# EAGLE board ASD2101 (EAGLE 6.2)
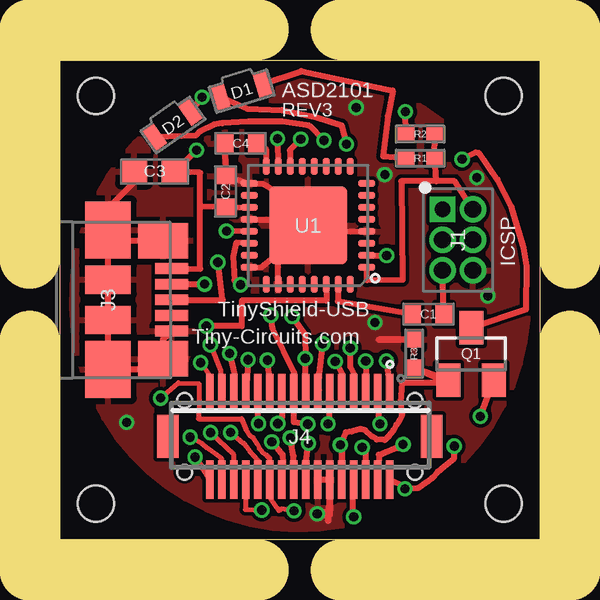
[diagram p0: board, top side]
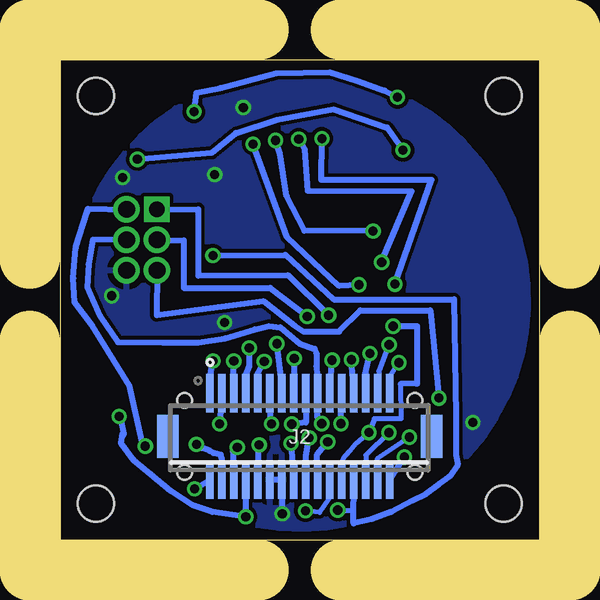
[diagram p1: board, bottom side, seen from below]

Size 20 x 20 mm. Coordinates in mm from the lower left corner, seen from the top.
Outline: 0,20 20,20 20,0 0,0 0,20
Copper layers (1*16): Top 0.035mm / dielectric 1.5mm / Bottom 0.035mm
Design rules: minimum track width 8mil, minimum drill 15mil, track to track 6mil, track to pad 6mil, pad to pad 6mil, via to via 6mil, smd to smd 6mil, copper to edge 6mil, drill to drill 8mil, minimum pad ring 8mil, minimum via ring 5mil, stop-mask expansion 4mil, vias tented up to drill 25mil, thermal gap 10mil
Net classes: 2 gnd: width 0.305 mm, drill 0.559 mm, clearance 0.254 mm
Holes 1.5 mm at 1.5,18.5 18.5,18.5 18.5,1.5 1.5,1.5
Milling: 8 lines

## Footprints (pad centres in the part's own frame; a part is rotated, then mirrored left to right if it is on the bottom)
C0402 = smd 0.7 x 0.9: 1 -0.65,0; 2 0.65,0
C0603 = smd 1.1 x 1: 1 -0.85,0; 2 0.85,0
LNJ_LED = smd 1 x 0.55: A 0,0.9; C 0,-0.9
2X3_.05"_TH_HEADER = drill 0.65 pad 1.016 square: 1 -0.635,1.27 | drill 0.7 pad 1.016: 2 0.635,1.27; 3 -0.635,0; 4 0.635,0; 5 -0.635,-1.27; 6 0.635,-1.27
DF12-32-DS = smd 0.3 x 1.6: 1 -3.75,1.8; 2 -3.75,-1.8; 3 -3.25,1.8; 4 -3.25,-1.8; 5 -2.75,1.8; 6 -2.75,-1.8; 7 -2.25,1.8; 8 -2.25,-1.8; 9 -1.75,1.8; 10 -1.75,-1.8; 11 -1.25,1.8; 12 -1.25,-1.8; 13 -0.75,1.8; 14 -0.75,-1.8; 15 -0.25,1.8; 16 -0.25,-1.8; 17 0.25,1.8; 18 0.25,-1.8; 19 0.75,1.8; 20 0.75,-1.8; 21 1.25,1.8; 22 1.25,-1.8; 23 1.75,1.8; 24 1.75,-1.8; 25 2.25,1.8; 26 2.25,-1.8; 27 2.75,1.8; 28 2.75,-1.8; 29 3.25,1.8; 30 3.25,-1.8; 31 3.75,1.8; 32 3.75,-1.8 | smd 0.9 x 1.8: F1 -5.5,0; F2 5.5,0 | hole 0.6: -4.8,1.5; 4.8,1.5
MICRO_USB = smd 1.38 x 0.45: 1 2.66,1.3; 2 2.66,0.65; 3 2.66,0; 4 2.66,-0.65; 5 2.66,-1.3 | smd 2.1 x 1.475: P1 2.3,-2.462; P2 2.3,2.462 | smd 1.9 x 2.375: P3 0,2.913; P4 0,-2.913 | smd 1.9 x 1.175: P5 0,0.838; P6 0,-0.838
DF12-32-DP = smd 0.3 x 1.6: 1 -3.75,-1.8; 2 -3.75,1.8; 3 -3.25,-1.8; 4 -3.25,1.8; 5 -2.75,-1.8; 6 -2.75,1.8; 7 -2.25,-1.8; 8 -2.25,1.8; 9 -1.75,-1.8; 10 -1.75,1.8; 11 -1.25,-1.8; 12 -1.25,1.8; 13 -0.75,-1.8; 14 -0.75,1.8; 15 -0.25,-1.8; 16 -0.25,1.8; 17 0.25,-1.8; 18 0.25,1.8; 19 0.75,-1.8; 20 0.75,1.8; 21 1.25,-1.8; 22 1.25,1.8; 23 1.75,-1.8; 24 1.75,1.8; 25 2.25,-1.8; 26 2.25,1.8; 27 2.75,-1.8; 28 2.75,1.8; 29 3.25,-1.8; 30 3.25,1.8; 31 3.75,-1.8; 32 3.75,1.8 | smd 0.9 x 1.8: F1 -5.5,0; F2 5.5,0 | hole 0.6: -4.8,1.5; 4.8,1.5
SOT23 = smd 1 x 1.4: 1 -0.95,-1.1; 2 0.95,-1.1; 3 0,1.1
0402 = smd 0.7 x 0.6: 1 -0.6,0; 2 0.6,0
MLF32 = smd 0.7 x 0.28: 1 -2.45,1.75; 2 -2.45,1.25; 3 -2.45,0.75; 4 -2.45,0.25; 5 -2.45,-0.25; 6 -2.45,-0.75; 7 -2.45,-1.25; 8 -2.45,-1.75; 17 2.45,-1.75; 18 2.45,-1.25; 19 2.45,-0.75; 20 2.45,-0.25; 21 2.45,0.25; 22 2.45,0.75; 23 2.45,1.25; 24 2.45,1.75 | smd 0.28 x 0.7: 9 -1.75,-2.45; 10 -1.25,-2.45; 11 -0.75,-2.45; 12 -0.25,-2.45; 13 0.25,-2.45; 14 0.75,-2.45; 15 1.25,-2.45; 16 1.75,-2.45; 25 1.75,2.45; 26 1.25,2.45; 27 0.75,2.45; 28 0.25,2.45; 29 -0.25,2.45; 30 -0.75,2.45; 31 -1.25,2.45; 32 -1.75,2.45 | smd 3.254 x 3.254: 33 0,0

## Placement (x,y rotation side)
C1  0.1uF  [C0402]  15.36,9.4 0 top
C2  0.1uF  [C0402]  6.91,14.51 90 top
C3  10uF  [C0603]  3.94,15.35 180 top
C4  0.1uF  [C0402]  7.53,16.52 180 top
D1  AMBER  [LNJ_LED]  7.57,18.72 287 top
D2  AMBER  [LNJ_LED]  4.7,17.3 305 top
J1  20021111  [2X3_.05"_TH_HEADER]  16.59,12.5 0 top
J2  DF12-32-DS  [DF12-32-DS]  10,4.3 0 bottom
J3  47346-0001  [MICRO_USB]  2,10 0 top
J4  DF12-32-DP  [DF12-32-DP]  10,4.3 180 top
Q1  DMP2035U  [SOT23]  17.15,7.74 0 top
R1  1.00K  [0402]  15.02,15.9 0 top
R2  1.00K  [0402]  15.03,16.91 0 top
R3  1.00K  [0402]  14.77,7.75 270 top
U1  FT232RQ  [MLF32]  10.35,13.1 180 top
U$1  [DOCFIELD-TINYCIRCUITS-PCB]  33.97,-10.03 0 top  (outside the outline)

## Library data of the parts
C1 C2 C4 = tinycircuits; PARTNO: AS-ITM-00008
C3 = tinycircuits; PARTNO: AS-ITM-00002
D1 D2 = tinycircuits; PARTNO: AS-ITM-00026
J1 = tinycircuits; DNP: T; PARTNO: AS-ITM-00022
J2 = tinycircuits; PARTNO: AS-ITM-00012
J3 = tinycircuits; PARTNO: AS-ITM-00021
J4 = tinycircuits; PARTNO: AS-ITM-00015
Q1 = tinycircuits; PARTNO: AS-ITM-00024
R1-R3 = tinycircuits; PARTNO: AS-ITM-00003
U1 = tinycircuits; PARTNO: AS-ITM-00029
U$1 = tinycircuits; NO_BOM: TRUE

## Nets
+3V3: J2.6 J4.6
+5V: J2.8 J4.8 Q1.2
AD0: J2.11 J4.11
AD1: J2.9 J4.9
AD2: J2.7 J4.7
AD3: J2.5 J4.5
AD4/SDA: J2.3 J4.3
AD5/SCL: J2.1 J4.1
AREF: J2.13 J4.13
DTR: C1.1 U1.31
GND: C2.2 C3.2 C4.2 J1.6 J2.12 J2.14 J3.5 J3.P1 J3.P2 J3.P3 J3.P4 J3.P5 J3.P6 J4.12 J4.14 R3.1 U1.4 U1.17 U1.20 U1.24 U1.26 U1.33
IO0: J2.24 J4.24 U1.30
IO1: J2.26 J4.26 U1.2
IO2: J2.28 J4.28
IO3: J2.30 J4.30
IO4: J2.32 J4.32
IO5: J2.31 J4.31
IO6: J2.29 J4.29
IO7: J2.27 J4.27
IO8: J2.25 J4.25
IO9: J2.23 J4.23
MISO: J1.1 J2.17 J4.17
MOSI: J1.4 J2.19 J4.19
N$1: C4.1 U1.16
N$2: J3.2 U1.15
N$5: D2.C U1.21
N$6: D1.A R1.1
N$7: D2.A R2.1
N$13: J3.3 U1.14
N$16: D1.C U1.22
RESET: C1.2 J1.5 J2.22 J4.22
RSV0: J2.20 J4.20
RSV1: J2.18 J4.18
RSV2: J2.16 J4.16
SCK: J1.3 J2.15 J4.15
SS: J2.21 J4.21
USBVCC: C2.1 C3.1 J3.1 Q1.3 U1.19
VBATT: J2.4 J4.4
VCC: J1.2 J2.2 J4.2 R1.2 R2.2 U1.1
VIN: J2.10 J4.10 Q1.1 R3.2

## Tracks (layer width: path | path; a pad name or v marks a point on that pad's centre or on a via)
+3V3  (via drill 0.38)
  Top 0.254: J2.6 12.76,3.69 v12.61,3.84
  Bottom 0.254: v12.61,3.84 12.78,3.66 12.78,2.53 J2.6
+5V  (via drill 0.38)
  Top 0.203: J2.8 12.22,1.92 12.24,2.36 J2.8
  Top 0.254: J2.8 | v17.53,5.14 Q1.2 | v12.25,0.95 12.23,1 12.23,1.1 12.22,1.1 12.22,1.92
  Bottom 0.254: 12.25,1.99 J2.8 | J2.8 | v17.53,5.14 17.43,4.91 17.33,4.4 17.41,4.28 17.38,4.43 17.46,4.02 16.92,3.31 16.21,2.72 15.38,2.01 14.46,1.43 13.65,1.15 v12.25,0.95 J2.8 | J2.8
AD0  (via drill 0.38)
  Top 0.254: v11.18,4.82 11.24,5.05 J2.11
  Bottom 0.254: J2.11 11.28,5.79 v11.18,4.82
AD1  (via drill 0.38)
  Top 0.254: v11.48,7.43 11.75,6.93 11.74,6.13 J2.9
  Bottom 0.254: J2.9 11.75,6.94 v11.48,7.43
AD2  (via drill 0.38)
  Top 0.254: J2.7 12.25,6.92 12.11,7.22 v12.11,7.99
  Bottom 0.254: v12.11,7.99 12.11,7.24 12.26,6.86 12.23,6.09 J2.7
AD3  (via drill 0.38)
  Top 0.254: J2.5 12.75,6.28 v12.75,7.44
  Bottom 0.254: v12.75,7.44 12.75,6.3 J2.5
AD4/SDA  (via drill 0.38)
  Top 0.254: v13.34,4.82 13.31,5 J2.3
  Bottom 0.254: J2.3 13.22,5.85 v13.34,4.82
AD5/SCL  (via drill 0.38)
  Top 0.254: J2.1 13.77,6.27 v13.61,7.45
  Bottom 0.254: v13.61,7.45 13.78,6.55 J2.1
AREF  (via drill 0.38)
  Top 0.254: 10.8,6.27 J2.13 10.8,6.91 v10.95,8.17
  Bottom 0.254: v10.95,8.17 10.77,6.59 J2.13
DTR
  Top 0.254: U1.31 11.59,9.94 C1.1
GND  (via drill 0.38)
  Top 0.254: J4.12 | J3.5 4.3,8.34 J3.P1 3.85,7.09 J3.P4 J3.P6 J3.P5 J3.P3 | J3.P3 2.45,12.46 J3.P2 | C3.2 3.09,14.9 1.96,13.77 1.96,12.95 J3.P3 | C4.2 C2.2 U1.17 8.47,14.84 9.79,14.05 9.61,13.29 | U1.20 9.38,13.34 9.61,13.29 | 9.61,13.29 U1.33 | U1.24 8.41,11.36 8.82,11.69 | 8.82,11.69 9.56,12.3 U1.33 | U1.4 11.08,12.81 U1.33 | J4.12 J4.14 | J4.12 11.26,1.2 v10.73,1.07 | J1.6 17.3,11.16 | 17.3,11.16 17.23,11.16 | R3.1 14.77,8.34 | 17.3,11.16 17.41,11.16 17.15,11.21 | R3.1 14.87,8.39 | J4.12 11.23,1 10.75,0.97 | R3.1 13.29,8.34 14.77,8.31 | J4.12 11.18,0.77 11.18,0.79 | U1.26 9.1,11.69 8.82,11.69
  Bottom 0.254: J4.12 J4.14 v10.73,1.07
  other vias: 2.78,4.88 12.35,18.02 13.55,15.22 17.38,15.1 13.14,9.05 17.84,10.17
  pour Top: 18.49,5.61 arc180 1.54,14.32 arc180
  pour Bottom: 18.49,5.61 arc180 1.54,14.32 arc180
IO0  (via drill 0.38)
  Top 0.203: J2.24 8.23,2.49 8.23,2.46 J2.24 | v7.11,4.46 7.66,4.02 7.77,3.87 7.92,3.68 8.05,3.51 8.27,3.27 8.28,3.21 8.26,2.79 J2.24
  Top 0.254: U1.30 11.11,9.96 7.58,9.96 7.58,8.9 v6.1,8.9
  Bottom 0.203: J2.24 8.22,3.01 8.21,3.29 8.17,3.39 8.07,3.5 7.91,3.69 7.65,4.02 v7.11,4.46 6.89,5.04 5.77,5.04 5.8,6.48
  Bottom 0.254: J2.24 | v6.1,8.9 5.11,8.9 5.11,6.51 5.14,6.51 5.8,6.48
IO1  (via drill 0.38)
  Top 0.203: 7.74,2.41 J2.26 7.73,1.25 v8.41,1.23
  Top 0.254: U1.2 v13.62,11.84
  Bottom 0.203: 7.76,2.33 J2.26 7.75,1.38 7.83,1.23 v8.41,1.23
  Bottom 0.254: v13.62,11.84 10.6,11.87 8.59,10.02 3.56,10.02 3.49,5.14 3.49,3.54 3.41,3.11 3.77,2.62 4.2,2.29 4.76,1.89 5.29,1.63 6.18,1.15 7.02,0.85 7.75,0.67 J2.26
IO2  (via drill 0.38)
  Top 0.203: 7.24,1.91 7.24,1.9 J2.28 | 7.25,1.99 J2.28 | J2.28 7.26,3.53 v6.28,4.46
  Bottom 0.203: v6.28,4.46 7.25,3.52 7.24,2.34 J2.28
IO3  (via drill 0.38)
  Top 0.203: J2.30 6.74,3.35 6.73,3.41 6.19,3.79 6.13,3.82 5.92,4 v5.43,4.27
  Top 0.254: J2.30
  Bottom 0.203: J2.30 6.75,3.38 v5.43,4.27
IO4  (via drill 0.38)
  Top 0.254: v5.64,3.44 J2.32
  Bottom 0.254: J2.32 v5.64,3.44
IO5  (via drill 0.38)
  Top 0.203: v5.87,7.38 6.26,6.82
  Top 0.254: 6.26,6.82 6.26,6.12 J2.31
  Bottom 0.203: 6.26,6.78 v5.87,7.38
  Bottom 0.254: J2.31 6.26,6.78
IO6  (via drill 0.38)
  Top 0.203: J2.29 6.71,7.02 v6.27,8.12
  Bottom 0.203: v6.27,8.12 6.7,7.03 6.76,6.36 J2.29
  Bottom 0.254: 6.78,5.56 J2.29
IO7  (via drill 0.38)
  Top 0.254: v7.08,7.76 7.28,6.86 J2.27
  Bottom 0.254: J2.27 7.25,5.76 7.25,6.92 v7.08,7.76
IO8  (via drill 0.38)
  Top 0.254: v7.84,7.5 7.84,7.48 J2.25
  Bottom 0.254: J2.25 7.76,6.12 | J2.25 7.76,6.14 7.76,6.08 | J2.25 v7.84,7.5
IO9  (via drill 0.38)
  Top 0.254: v8.28,4.83 8.25,4.97 J2.23
  Bottom 0.254: J2.23 8.28,5.59 v8.28,4.83
MISO  (via drill 0.38)
  Top 0.254: v10.33,4.81 9.75,4.89 9.75,6.07 J2.17 9.76,6.97 8.87,8.8 v8.8,9.36
  Bottom 0.254: J2.17 9.75,4.88 v10.33,4.81 | J1.1 14.23,13.77 14.23,11.01 10.5,11.03 v8.8,9.36
MOSI  (via drill 0.38)
  Top 0.254: J2.19 9.25,5.07 v9.08,4.83
  Bottom 0.254: v9.08,4.83 9.25,5.08 9.25,6.07 J2.19 9.3,7.22 9.3,7.78 9.38,7.96 10.02,8.19 10.8,8.85 11.29,8.9 11.87,8.77 13.11,8.39 14.23,8.21 15.7,8.21 17.58,8.24 18.32,9.3 18.85,10.52 18.8,11.49 18.63,12.5 J1.4
N$1
  Top 0.254: C4.1 8.59,16.29 U1.16
N$2  (via drill 0.38)
  Top 0.254: J3.2 v6.03,10.65 | v9.07,16.72 U1.15
  Bottom 0.254: v6.03,10.65 4.5,14.99 9.1,14.99 v9.07,16.72
N$5  (via drill 0.38)
  Top 0.254: U1.21 v6.94,12.86 | v11.01,16.64 10.4,17.25 9.28,17.43 7.86,17.43 6.76,17.36 6.41,17.3 5.85,17.03 5.67,16.85 D2.C
  Bottom 0.254: v6.94,12.86 9.81,12.89 10.55,14.33 10.83,16.09 v11.01,16.64
N$6
  Top 0.254: D1.A 10.07,19.54 13.88,18.73 13.67,17.66 13.47,15.98 R1.1
N$7  (via drill 0.38)
  Top 0.254: R2.1 v14.41,17.84 | v5.93,18.45 D2.A
  Bottom 0.254: v14.41,17.84 14.38,17.96 14.31,18.63 13.32,18.83 10.98,19.44 8.75,19.49 7.55,19.11 6.46,18.73 v5.93,18.45
N$13  (via drill 0.38)
  Top 0.254: v10.04,16.7 9.58,16.24 U1.14 | J3.3 6.79,9.99 v6.59,11.57
  Bottom 0.254: v6.59,11.57 5.34,14.51 9.66,14.54 9.79,16.26 v10.04,16.7
N$16  (via drill 0.38)
  Top 0.254: U1.22 7.35,12.38 7.22,11.79 7.27,10.8 v7.53,10.62 | D1.C 7.8,17.96 9.25,17.91 10.7,17.61 11.74,17.28 v11.95,16.49
  Bottom 0.254: v7.53,10.62 8.36,10.57 10.52,12.61 v11.95,16.49
RESET  (via drill 0.38)
  Top 0.203: v4.2,5.9 4.94,6.54 5.8,6.51 5.8,5.65 5.77,5.04 7.58,5.04 7.75,4.58 7.91,4.35 8.06,4.25 8.21,3.99 8.31,3.79 8.44,3.64 8.62,3.51 8.75,3.39 J2.22 8.8,1.68 9.13,1.2 9.23,1.28 v9.76,1.2
  Top 0.254: J2.22 | C1.2 J1.5
  Bottom 0.203: J2.22 8.8,1.68 9.18,1.12 v9.76,1.2
  Bottom 0.254: J1.5 15.96,9.36 11.51,9.94 10.22,8.92 9.84,8.67 8.36,8.67 7.48,9.56 4.55,9.56 v4.2,5.9
RSV0  (via drill 0.38)
  Top 0.254: v8.83,4.08 9.29,3.54 9.3,3.21 J2.20
  Bottom 0.254: J2.20 9.27,3.54 v8.83,4.08
RSV1  (via drill 0.38)
  Top 0.254: J2.18 9.74,2.51 9.74,3.48 9.66,3.92 v9.61,4.24
  Bottom 0.254: J2.18 9.75,3.48 v9.61,4.24
RSV2  (via drill 0.38)
  Top 0.254: J2.16 10.24,3.12 v10.37,4.01
  Bottom 0.254: v10.37,4.01 J2.16
SCK  (via drill 0.38)
  Top 0.254: v9.68,9.3 10.22,8.54 v10.23,7.55 10.24,7.58 J2.15
  Bottom 0.254: J1.3 14.84,12.48 14.84,10.5 11.23,10.5 v9.68,9.3 | v10.23,7.55 J2.15
SS  (via drill 0.38)
  Top 0.254: J2.21 8.75,6.25 v8.65,7.48
  Bottom 0.254: v8.65,7.48 8.74,6.05 J2.21
USBVCC  (via drill 0.38)
  Top 0.254: U1.19 6.89,13.88 C2.1 5.84,13.88 | J3.1 5.85,11.29 5.84,13.88 | 5.84,13.88 5.85,15.3 C3.1 v5.7,16.24 | Q1.3 19.44,9.61 19.46,11.41 19.34,12.15 18.83,13.88 18.25,15.02 17.48,16.11 17.33,16.14 v16.77,15.86
  Bottom 0.254: v16.77,15.86 13.65,16.14 12.66,16.95 10.95,17.51 8.59,17.94 6.36,17.18 v5.7,16.24
VBATT  (via drill 0.38)
  Top 0.254: v14.31,3.97 14.16,3.82 14.05,3.82 13.44,3.56 13.29,3.54 J4.4
  Bottom 0.254: J4.4 13.25,3.37 13.29,3.54 13.6,3.61 13.75,3.69 14.08,3.82 v14.31,3.97
VCC  (via drill 0.38)
  Top 0.254: v16.44,3.89 16.44,3.39 16.04,3.06 15.76,2.83 15.53,2.57 15.32,2.42 14.92,2.14 v14.38,2.12 14.41,2.19 J2.2 | J1.2 16.47,14.94 15.68,14.94 | 15.68,14.94 14.23,14.94 14.28,10.83 12.81,10.8 U1.1 | 15.68,14.94 R1.2 R2.2
  Bottom 0.254: v16.44,3.89 16.57,4.07 17.1,6.41 18.65,8.92 19.39,9.89 19.44,10.9 19.34,12.17 18.85,13.67 18.83,13.8 J1.2 | v14.38,2.12 J2.2
VIN  (via drill 0.38)
  Top 0.254: Q1.1 R3.2 16.19,6.54 14.26,6.54 14.21,5.72 14.26,5.16 14.16,4.96 14.03,4.78 13.9,4.55 13.7,4.3 13.55,4.15 13.22,4.17 13.01,4.3 12.73,4.55 12.53,4.61 12.17,4.5 11.92,4.48 v11.69,3.95 | J2.10 11.77,2.5 11.77,3.84 11.69,3.84 v11.69,3.95 | v11.69,3.95 11.74,3.95 11.74,3.99 11.77,3.99 11.77,2.45
  Bottom 0.254: v11.69,3.95 11.75,3.95 J2.10

## Text on the board
tPlace: ASD2101 | REV3 | ICSP | TinyShield-USB | Tiny-Circuits.com
Document: FABRICATION DRAWING | NOTES: | 1. PRINTED CIRCUIT BOARD MADE FROM NEMA GRADE FR-4 EPOXY LAMINATE | WITH 1 OUNCE COPPER PLATING AND .024 THICKNESS. | 2. ALL DIMENSIONS ARE GIVEN IN INCHES. | 3. CIRCUIT PATHS ARE FOR REFERENCE ONLY. | 4. HOLE SIZES SHOWN ARE FINISHED DIAMETERS AFTER PLATING. | 5. BOARD PLATED USING REFLOW OR SIMILAR METHOD. | 6. BOARD TO HAVE BLUE SOLDER MASK ON PLATED SURFACES USING WET FILM | 7. SILKSCREEN BOARD USING WHITE INK. | SR100 OR SR1010 EPOXY. EQUIVALENT WET OR DRY FILM MAY BE USED. | 8. THE FOLLOWING INFORMATION APPLIES TO THIS BOARD: | * 2 COPPER LAYERS | * .024 BOARD THICKNESS | * REQUIRES TOP SIDE SILKSCREEN | Released under the Creative Commons Attribution Share-Alike 3.0 License | http://creativecommons.org/licenses/by-sa/3.0 | Original Arduino Uno Design by Team Arduino | LilyPad Arduino Design by Leah Buechley and Sparkfun Electronics | TinyDuino, TinyLily and TinyShield Designs by TinyCircuits | TinyShield - USB & ICP | AS-PCB-ASD2101 | 3